# Altium PCB SensorModulePCB.PcbDoc
Units mm, origin at the board's own origin, x right, y up, seen from the top; angles counter-clockwise.
Board outline 25 x 35 mm, 2 copper layers (Top Layer, Bottom Layer); 4 components, 4 nets, 16 pads, 1 vias.
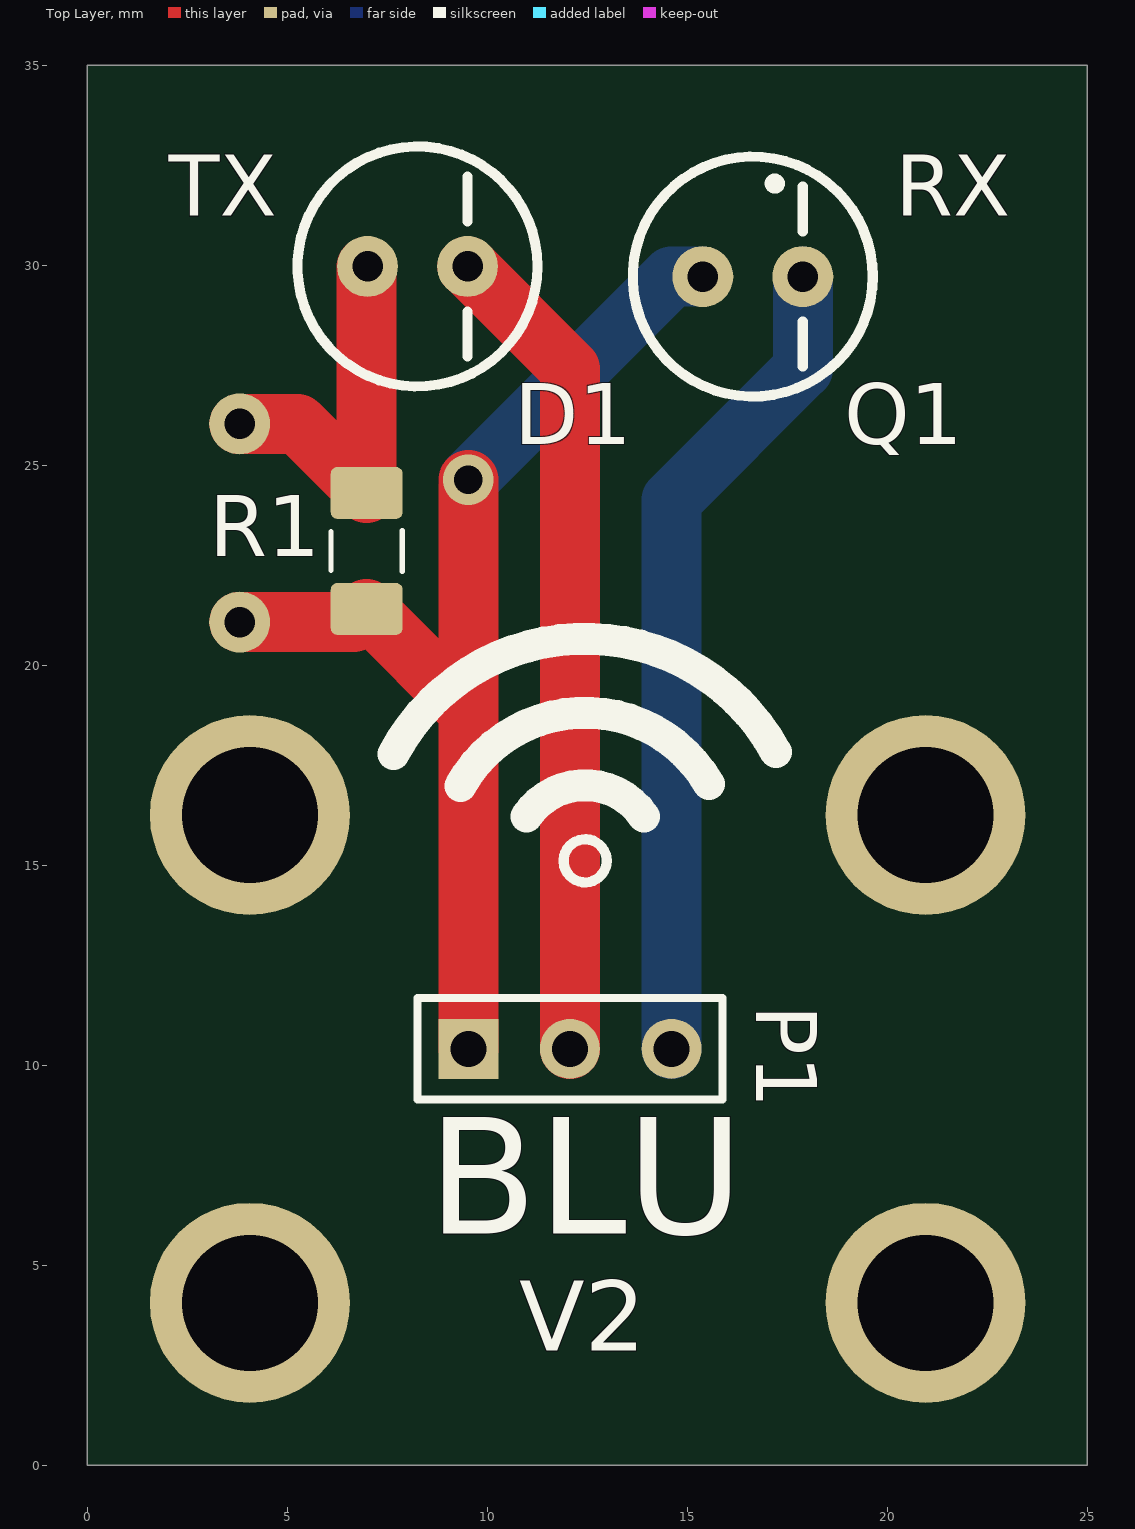
[diagram p0: Top Layer view]
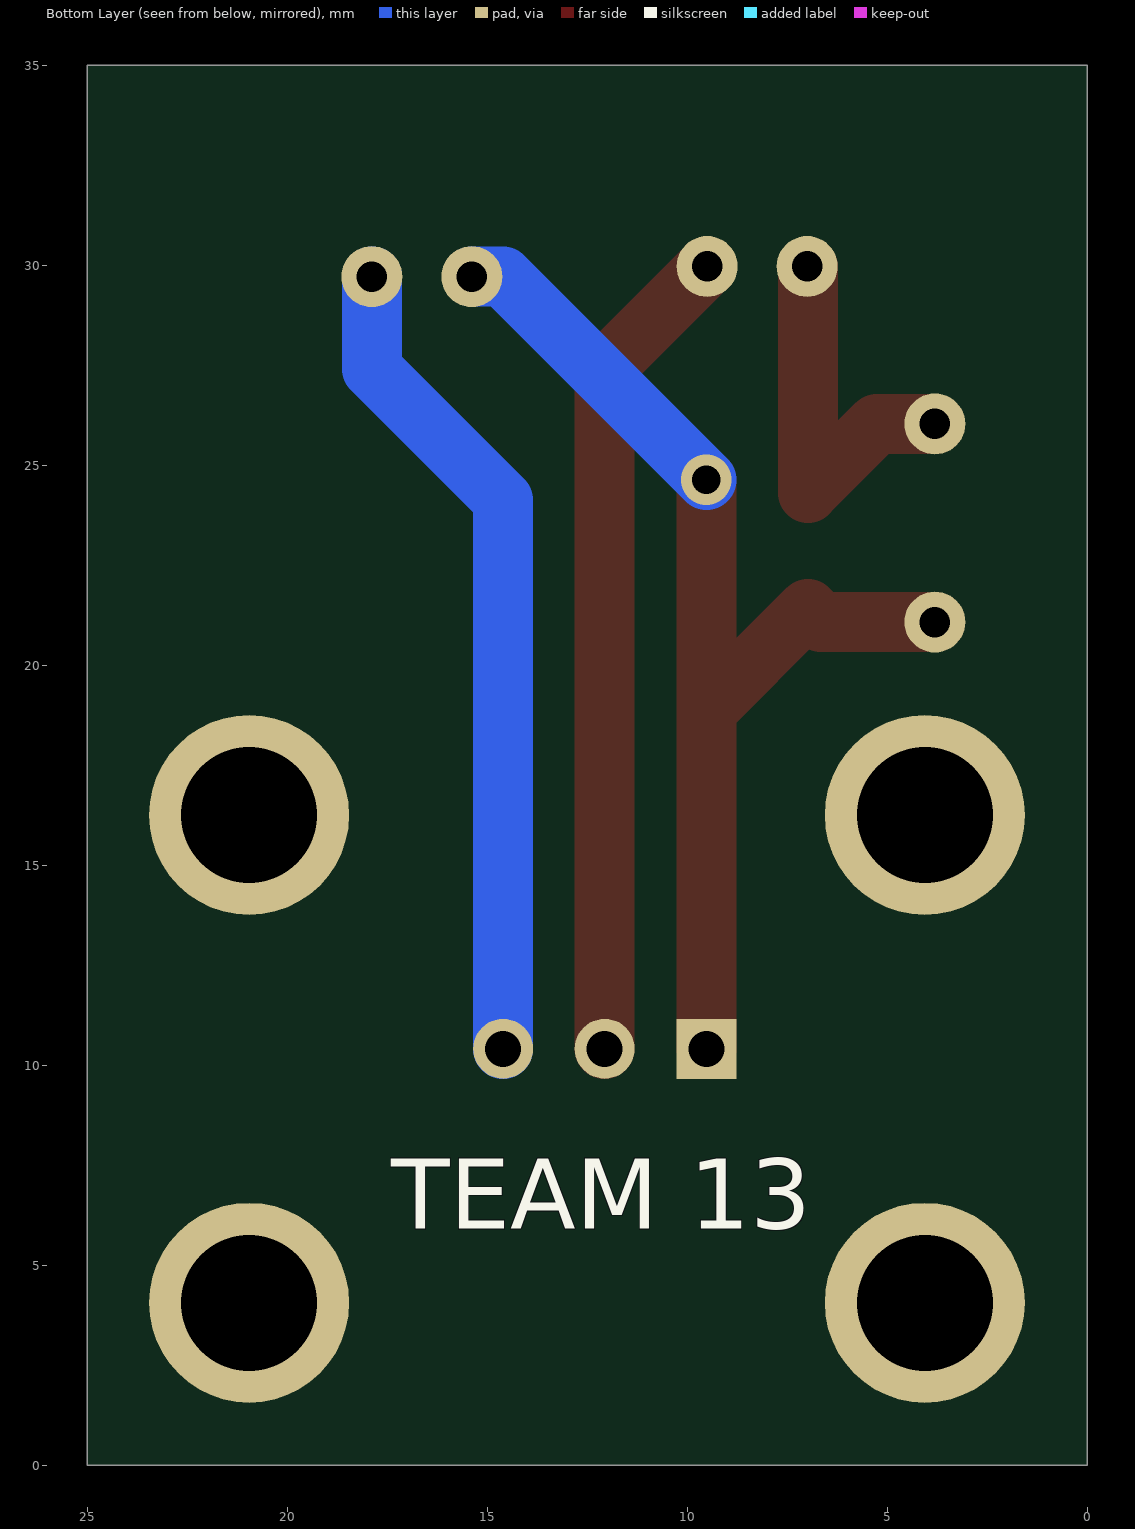
[diagram p1: Bottom Layer view, seen from below]

## Layer stack, top to bottom
Top Solder: solder mask 0.0102, Solder Resist, Dk 3.5
Top Layer: signal copper 0.0356
Dielectric 1: dielectric 0.32, FR-4, Dk 4.8
Bottom Layer: signal copper 0.0356
Bottom Solder: solder mask 0.0102, Solder Resist, Dk 3.5

## Board outline
0,0 25,0 25,35 0,35

## Design rules (kind name [scope] priority, off if disabled: settings)
Clearance [All] p1: gap=0.3
PolygonConnect [All] p1: connectstyle=Relief reliefconductorwidth=0.254 reliefentries=4 polygonreliefangle="90 Angle" airgapwidth=0.254
RoutingVias [All] p1: holewidth=0.4 width=0.9 viastyle="Through Hole" minholewidth=0.711 minwidth=1.27 maxholewidth=0.711 maxwidth=1.27
SolderMaskExpansion [All] p1: expansion=0.102
Width [All] p1: maxlimit=1.5 minlimit=0.3 preferedwidth=1 minimp=50.000000 maximp=50.000000 favimp=50.000000
30 further rules are at their usual default settings.

## Components (designator, comment, footprint, x,y, rotation, side; value= is the part's Value field where it differs from the comment)
D1 "IR LED" STDLED 8.255,29.972 r0 top
P1 "MODULE_HEADER" HDR1X3 9.525,10.414 r0 top
Q1 "IR NPN" IRNPN 16.637,29.718 r0 top
R1 "Thick Film" RESC3216N_ZERO 6.985,22.86 r90 top

## Footprints (in the part's own frame and the unit in brackets; to place one, negate y for a bottom-side part, rotate by r counter-clockwise, add the part's x,y. Pads: shape width x height; smd on the part's side, far side on the other; paste and mask are expansions set on the pad)
HDR1X3 [mm] "Connector; Header; 3 Position"
  rect 1.5x1.5 hole 0.9: 1(0,0)
  round 1.5 hole 0.9: 2(2.54,0) 3(5.08,0)
  silkscreen extent -1.27,-1.27 6.35,1.27
IRNPN [mil]
  round 60 hole 30: 1(-49.21,0) 3(49.21,0)
  silkscreen extent -118,-118 118,118
RESC3216N_ZERO [mm] "Chip Resistor, Body 3.2x1.6mm, 1206, IPC Medium Density"
  round 0.508 on Mech15: 0(0,0)
  rrect25% 1.3x1.8 smd: 1(-1.45,0) 2(1.45,0)
  silkscreen extent -0.51,-0.89 0.51,0.89, body extent -1.62,-0.82 1.63,0.83, height 0.69
STDLED [mil]
  round 60 hole 30: A(-49.21,0) K(49.21,0)
  silkscreen extent -118,-118 118,118

## Part data
D1: library part IR_LED
P1: library part "Header 3", "Header, 3-Pin"
Q1: library part IR_NPN
R1: library part RES_0R_1206, "Resistor SMD chip 0.0 Ohm 0.25W 1206"

## Free pads (board coordinates)
  round 5 hole 3.4: 0(4.064,4.064) 0(4.064,16.256) 0(20.955,4.064) 0(20.955,16.256)
  round 1.524 hole 0.762: 1(3.81,26.035) 2(3.81,21.082)

## Via types
v1: diameter 1.27, hole 0.711, Top Layer to Bottom Layer, 1 vias

## Nets (pads, with @x,y where several pads share a name; then routed paths per layer and width w, separated by ;. In a path a pad name is that pad's centre, name@x,y a point inside that pad or via, vN(x,y) a via of type N, cw(c..) or ccw(c..) an arc to the next point about the centre after c; other vN are vias at no path point)
NetD1_A: D1.A pad.1 R1.2 | length 9.5
  Top Layer w1.5: pad.1 5.26,26.035 R1.2 D1.A@6.985,29.952
NetD1_K: D1.K P1.2 | length 20.6
  Top Layer w1.5: D1.K 12.065,27.412 P1.2
NetP1_1: P1.1 pad.2 Q1.1 R1.1 | length 29.1
  Top Layer w1.5: pad.2 6.657,21.082 R1.1 9.525,18.87 ; P1.1 9.525,18.87 ; v1(9.525,24.638) 9.525,18.87
  Bottom Layer w1.5: v1(9.525,24.638) 14.605,29.718 Q1.1
NetP1_3: P1.3 Q1.3 | length 20.7
  Bottom Layer w1.5: P1.3 14.605,24.13 17.887,27.412 Q1.3
pads on no net: R1.0

## Silkscreen, mask and mechanical layers (free items; w line width, h text height)
Top Overlay:
  circle w0.254: c12.446,15.113 r0.539
  lines w0.8: 7.651,17.778 cw(c12.446,15.24) 17.214,17.828 ; 9.326,16.987 cw(c12.446,15.24) 15.544,17.027 ; 10.978,16.219 cw(c12.446,15.24) 13.914,16.219
  text "TX" at 2.032,31.242 h1.52
  text "RX" at 20.193,31.242 h1.52
  text "BLU" at 8.509,4.826 h5
  text "V2" at 10.795,2.286 h3
Bottom Overlay:
  text "TEAM 13" at 17.399,5.334 h3
Mechanical 1:
  the board outline again, w0.3
Drill Drawing:
  text ".LEGEND" at 30.08,5.08 h1.52
  text "Drill Drawing." at 30.08,2.54 h1.52

## Dimensions
0,0 to 25,0 on Mechanical 1
0,0 to 0,35 on Mechanical 1